# Altium PCB PCB1.PcbDoc (part 2 of 2)
Units mm, origin at the board's own origin, x right, y up, seen from the top; angles counter-clockwise.
Board outline 135 x 78 mm, 2 copper layers (Top Layer, Bottom Layer); 157 components, 80 nets, 337 pads, 19 vias.
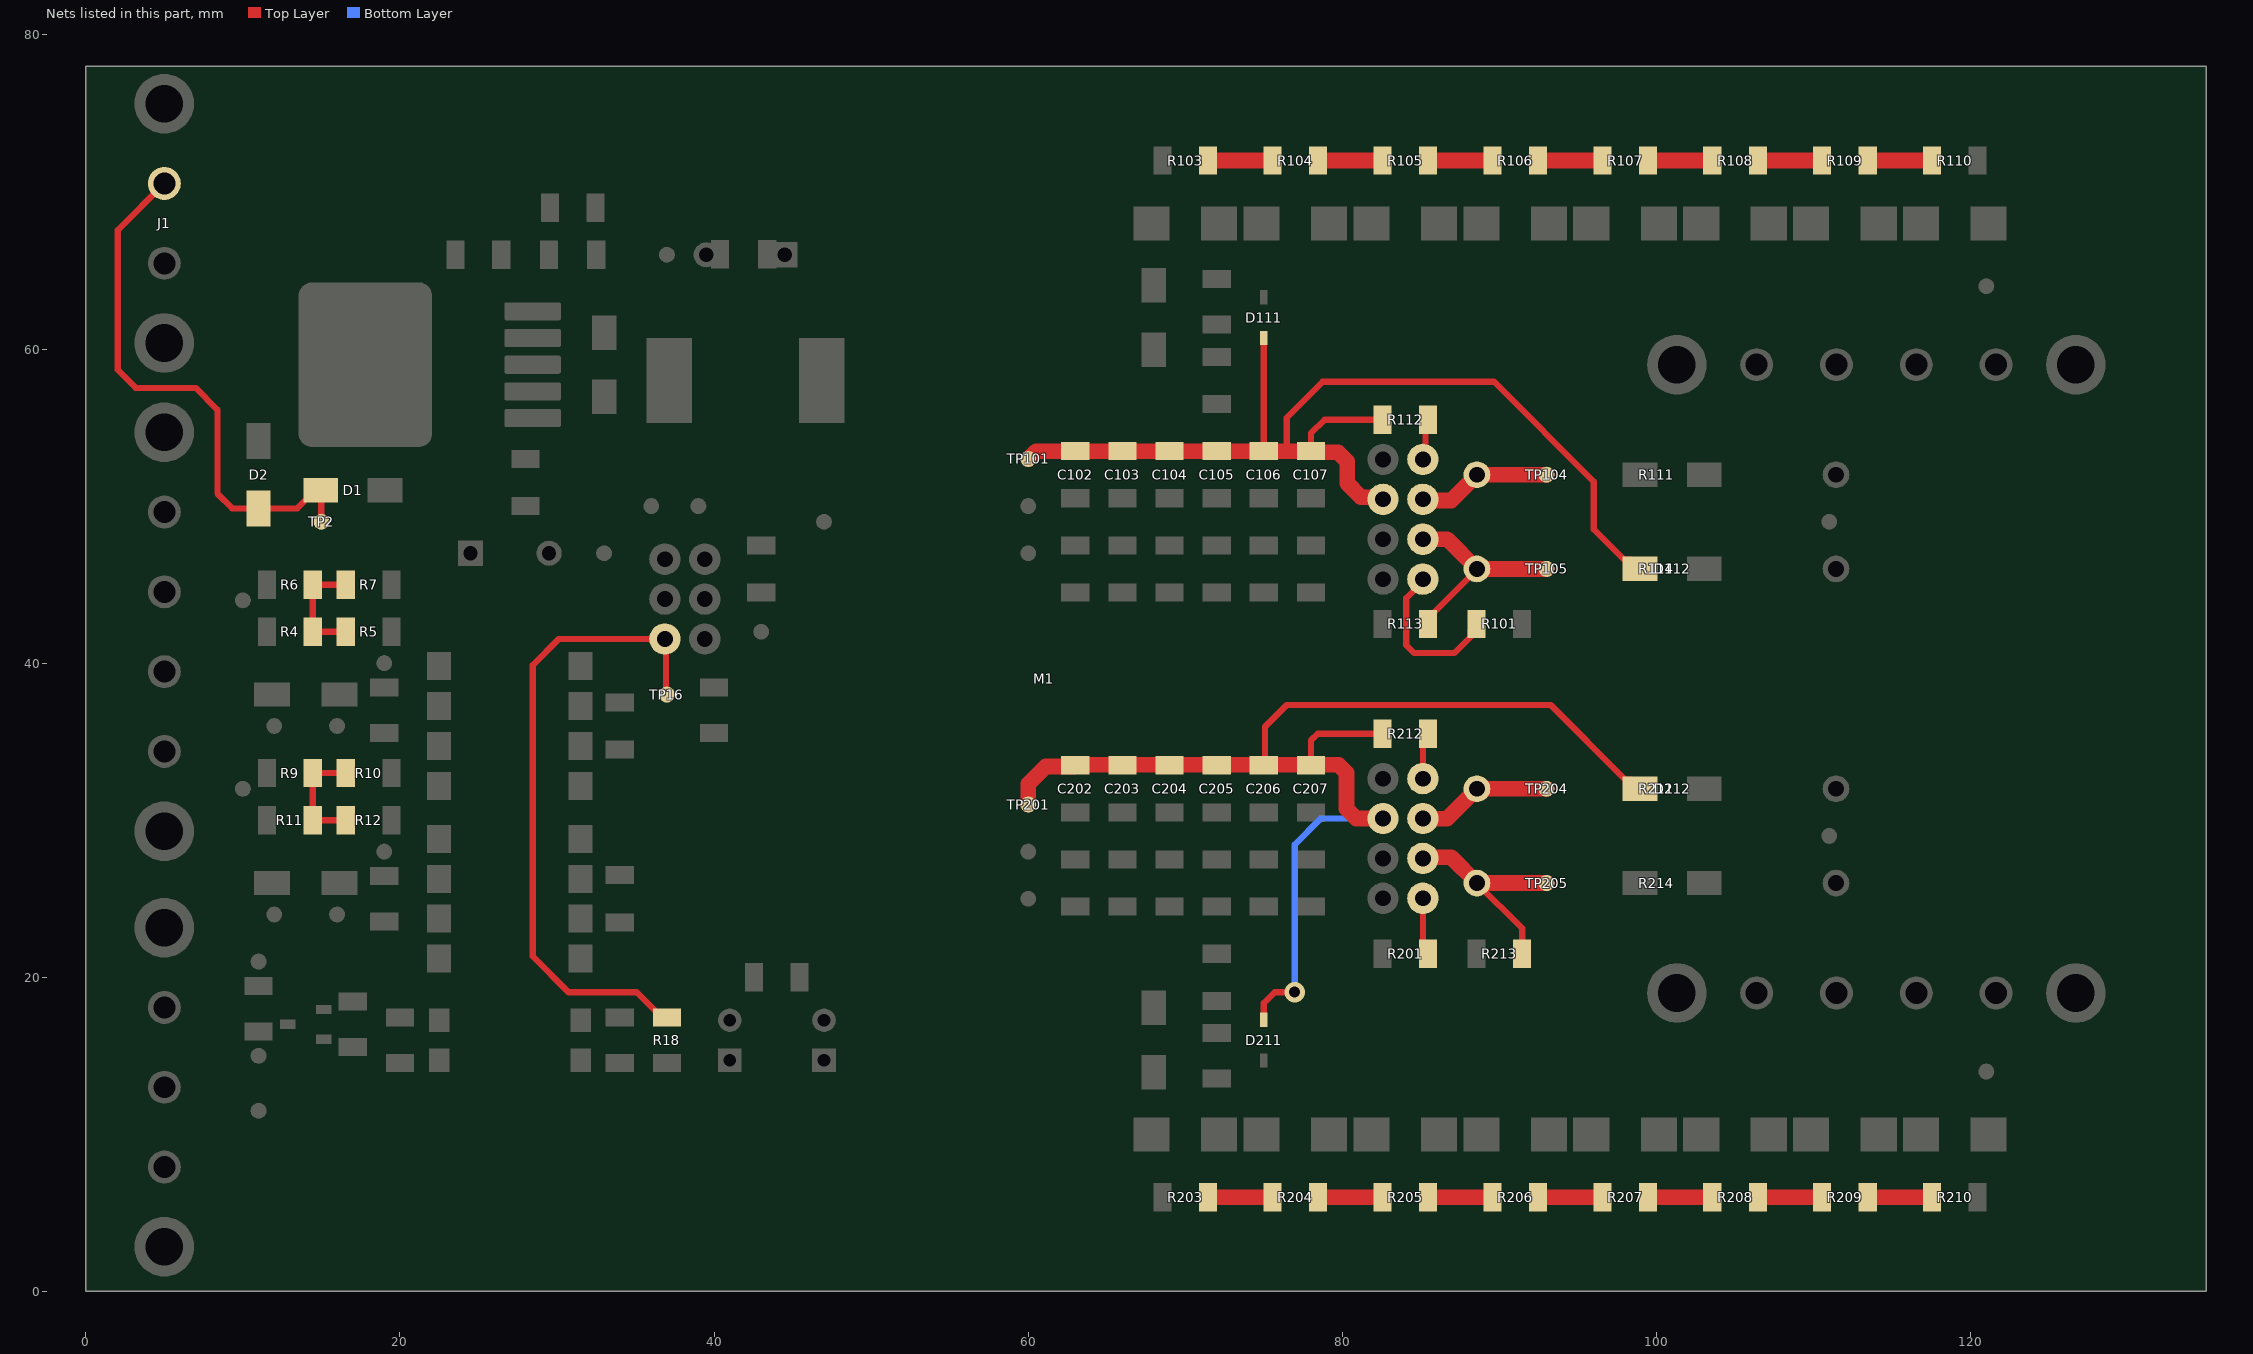
[diagram p2: the nets of this part, all layers, seen from the top]

## Via types
v1: diameter 1.3, hole 0.7, Top Layer to Bottom Layer, 19 vias

## Nets (pads, with @x,y where several pads share a name; then routed paths per layer and width w, separated by ;. In a path a pad name is that pad's centre, name@x,y a point inside that pad or via, vN(x,y) a via of type N, cw(c..) or ccw(c..) an arc to the next point about the centre after c; other vN are vias at no path point) (continued)
NetM1_2: M1.2 R18.1 TP16.1 | length 41.4
  Top Layer w0.4: R18.1@37,17.45 36.675,17.45 35.075,19.05 30.734,19.05 28.448,21.336 28.448,39.878 30.11,41.54 M1.2@36.87,41.54 36.935,41.475 36.935,38.065 TP16.1@37,38
NetM1_8: M1.8 R112.1 | length 2.7
  Top Layer w0.4: M1.8@85.13,52.97 85.29,53.13 85.29,55.34 R112.1@85.45,55.5
NetM1_10: M1.10 R111.1 TP104.1 | length 8.8
  Top Layer w1: M1.10@85.13,50.43 85.203,50.357 86.927,50.357 R111.1@88.57,52 ; R111.1@88.381,52 TP104.1@93,52
NetM1_12: M1.12 R113.1 R114.1 TP105.1 | length 13.5
  Top Layer w0.4: R113.1@85.45,42.5 85.45,42.825 88.57,45.945 R114.1@88.57,46
  Top Layer w1: M1.12@85.13,47.89 85.137,47.897 86.673,47.897 R114.1@88.57,46 TP105.1@93,46
NetM1_14: M1.14 R101.1 | length 10.3
  Top Layer w0.4: M1.14@85.13,45.35 85.13,45.199 84.074,44.143 84.074,41.148 84.582,40.64 87.122,40.64 88.175,41.693 88.175,42.125 R101.1@88.55,42.5
NetM1_16: M1.16 R212.1 | length 3
  Top Layer w0.4: M1.16@85.13,32.65 85.13,35.18 R212.1@85.45,35.5
NetM1_18: M1.18 R211.1 TP204.1 | length 8.7
  Top Layer w1: M1.18@85.13,30.11 85.137,30.103 86.673,30.103 R211.1@88.57,32 TP204.1@93,32
NetM1_20: M1.20 R213.1 R214.1 TP205.1 | length 14.8
  Top Layer w0.4: R214.1@88.57,26 91.45,23.12 R213.1@91.45,21
  Top Layer w1: M1.20@85.13,27.57 85.203,27.643 86.927,27.643 R214.1@88.57,26 TP205.1@93,26
NetM1_22: M1.22 R201.1 | length 3.7
  Top Layer w0.4: M1.22@85.13,25.03 85.13,21.82 R201.1@85.45,21.5
NetR4_2: R4.2 R5.1 R6.2 R7.1 | length 7.2
  Top Layer w0.4: R5.1@16.55,42 R4.2@14.45,42 R6.2@14.45,45 R7.1@16.55,45
NetR9_2: R9.2 R10.1 R11.2 R12.1 | length 7.2
  Top Layer w0.4: R12.1@16.55,30 R11.2@14.45,30 R9.2@14.45,33 R10.1@16.55,33
NetR103_2: R103.2 R104.1 | length 4.1
  Top Layer w1: R103.2@71.45,72 R104.1@75.55,72
NetR104_2: R104.2 R105.1 | length 4.1
  Top Layer w1: R104.2@78.45,72 R105.1@82.55,72
NetR105_2: R105.2 R106.1 | length 4.1
  Top Layer w1: R105.2@85.45,72 R106.1@89.55,72
NetR106_2: R106.2 R107.1 | length 4.1
  Top Layer w1: R106.2@92.45,72 R107.1@96.55,72
NetR107_2: R107.2 R108.1 | length 4.1
  Top Layer w1: R107.2@99.45,72 R108.1@103.55,72
NetR108_2: R108.2 R109.1 | length 4.1
  Top Layer w1: R108.2@106.45,72 R109.1@110.55,72
NetR109_2: R109.2 R110.1 | length 4.1
  Top Layer w1: R109.2@113.45,72 R110.1@117.55,72
NetR203_2: R203.2 R204.1 | length 4.1
  Top Layer w1: R203.2@71.45,6 R204.1@75.55,6
NetR204_2: R204.2 R205.1 | length 4.1
  Top Layer w1: R204.2@78.45,6 R205.1@82.55,6
NetR205_2: R205.2 R206.1 | length 4.1
  Top Layer w1: R205.2@85.45,6 R206.1@89.55,6
NetR206_2: R206.2 R207.1 | length 4.1
  Top Layer w1: R206.2@92.45,6 R207.1@96.55,6
NetR207_2: R207.2 R208.1 | length 4.1
  Top Layer w1: R207.2@99.45,6 R208.1@103.55,6
NetR208_2: R208.2 R209.1 | length 4.1
  Top Layer w1: R208.2@106.45,6 R209.1@110.55,6
NetR209_2: R209.2 R210.1 | length 4.1
  Top Layer w1: R209.2@113.45,6 R210.1@117.55,6
VIN: D1.2 D2.1 J1.1 TP2.1 | length 35.3
  Top Layer w0.4: J1.1@5,70.54 2.032,67.572 2.032,58.674 3.184,57.522 6.994,57.522 8.382,56.134 8.382,50.8 9.332,49.85 D2.1@11,49.85 13.475,49.85 14.625,51 D1.2@14.95,51 15,50.95 TP2.1@15,49
VISO_A: C102.2 C103.2 C104.2 C105.2 C106.2 C107.2 D111.1 D112.1 M1.9 R112.2 TP101.1 | length 70.4
  Top Layer w0.4: C105.2@72,53.5 C105.2@72.325,53.5 ; C106.2@75,53.5 75,56.712 D111.1@75,60.7 ; 76.454,53.5 76.454,55.626 78.74,57.912 89.662,57.912 96.012,51.562 96.012,48.514 97.951,46.575 98.375,46.575 D112.1@98.95,46 ; C107.2@78,53.5 78,54.632 78.868,55.5 R112.2@82.55,55.5
  Top Layer w1: TP101.1@60.003,53.003 60.007,53.003 60.504,53.5 C103.2@66,53.5 C104.2@69,53.5 C105.2@72,53.5 ; C105.2@72.325,53.5 C106.2@75,53.5 75.278,53.5 76.454,53.5 C107.2@78,53.5 78.075,53.425 79.723,53.425 80.309,52.839 80.309,51.453 81.193,50.569 82.451,50.569 M1.9@82.59,50.43
VISO_B: C202.2 C203.2 C204.2 C205.2 C206.2 C207.2 D211.1 D212.1 M1.17 R212.2 TP201.1 | length 82.1
  Top Layer w0.4: D211.1@75,17.3 75,18.358 75.692,19.05 v1(76.962,19.05) ; C206.2@75.353,33.528 75.325,33.5 C206.2@75,33.5 74.676,33.824 75.03,33.824 75.081,33.875 75.081,35.965 76.454,37.338 93.261,37.338 98.024,32.575 98.375,32.575 D212.1@98.95,32 ; C207.2@78,33.5 78,33.528 78,35.074 78.426,35.5 R212.2@82.55,35.5
  Top Layer w1: TP201.1@60,31 60,32.314 61.111,33.425 62.925,33.425 63.028,33.528 66,33.528 69,33.528 72,33.528 C206.2@75,33.528 ; C206.2@75.353,33.528 78,33.528 79.756,33.528 80.264,33.02 80.264,30.734 80.888,30.11 M1.17@82.59,30.11
  Bottom Layer w0.4: v1(76.962,19.05) 76.962,28.448 78.624,30.11 M1.17@82.59,30.11
pads on no net: IC2.1 IC2.4 IC3.1 IC3.4 J1.P1 J1.P2 J2.P1 J2.P2 J3.2 J3.P1 J3.P2 J4.P1 J4.P2 J5.3 J5.P1 J5.P2

## Polygon pours and split planes (outlines as drawn)
GND on Top Layer "GND_L01_P000" (solid, pour order 0): 4,67 11,67 13,65 20,65 23,68 40.318,68 49,59.318 49,12 48,11 31,11 30,12 30,44 25.486,48.514 10.486,48.514 9,50 9,61 6,64 4,64 3,65 3,66
GND on Bottom Layer "GND_L02_P001" (solid, pour order 1): 4,67 11,67 13,65 20,65 23,68 39.199,68 49,58.199 49,12 48,11 31,11 30,12 30,44 25.486,48.514 10.486,48.514 9,50 9,61 6,64 4,64 3,65 3,66

## Other copper
Top Layer:
  rectangle net NetR4_2: 13.907,41.121 17.131,45.901
  rectangle net NetR9_2: 13.89,29.109 17.114,33.89
  region net IN_A_P: 10.902,42.621 10.45,42.89 9.652,43.688 9.652,44.109 9.927,44.383 9.906,44.404 9.906,44.958 10.414,44.958 11.176,45.72 11.684,45.212 11.684,42.672 11.43,42.672 11.05,42.126
  region net IN_B_P: 9.948,34.793 10.808,33.896 11.45,33.896 11.45,30.5 11.176,30.226 11.176,30.734 9.906,32.004 9.906,33.528
  region net NetM1_20: 90.678,25.654 90.17,25.146 90.17,24.384 89.154,25.4 89.154,25.654
  region net COM_A: 58.094,46.959 60.997,44.233 61.271,44.507 61.411,44.507 61.411,44.761 58.928,47.244
  region net NetC2_1: 22.352,46.482 21.844,46.99 22.352,47.498 22.606,47.498
  region net +15V: 42.672,67.564 43.688,67.564 43.18,67.056
  region net +15V: 42.164,67.056 42.164,66.294 42.418,66.548 42.672,66.548
  region net +15V: 47.244,43.18 48.26,42.164 48.311,42.164 49.327,43.18
  region net +15V: 45.466,43.18 46.482,42.164 46.533,42.164 47.549,43.18
  region net +15V: 43.637,43.18 44.653,42.164 44.704,42.164 45.72,43.18
  region net +15V: 42.339,43.18 42.988,42.531 43.637,43.18
  region net EGND: 5.334,8.636 4.959,8.968 6.214,9.19 6.05,7.878
  region net +15V: 44.704,61.722 41.91,64.516 41.91,66.294 43.434,67.818 48.514,67.818 50.8,65.532 50.8,44.653 49.147,43 38.788,43 38.354,43.434 38.354,44.704 38.862,45.212 44.704,45.212 45.466,45.974 45.466,54.61 44.704,55.372
  region net NetC2_1: 25.654,56.134 30.226,56.134 30.734,55.626 30.734,52.832 30.226,52.324 27.178,52.324 25.908,51.054 25.908,46.228 25.4,45.72 23.114,45.72 22.352,46.482 22.352,52.832
  region net NetD3_1: 26.67,56.896 26.924,56.642 30.734,56.642 31.75,55.626 35.052,55.626 35.56,55.118 38.608,55.118 38.862,55.372 38.862,60.706 38.608,60.96 35.814,60.96 35.56,60.706 35.56,59.182 35.052,58.674 31.75,58.674 30.988,57.912 26.924,57.912 26.67,57.658
  region net EMITTER_A: 59.182,50.546 59.69,51.054 78.994,51.054 79.248,50.8 79.248,46.99 78.994,46.736 62.23,46.736 59.182,49.784
  region net EMITTER_B: 59.182,28.702 59.436,28.956 61.214,28.956 61.722,29.464 61.722,30.988 61.976,31.242 78.74,31.242 78.994,30.988 78.994,26.924 78.74,26.67 62.23,26.67 61.468,27.432 59.436,27.432 59.182,27.686
  region net GATE_A: 110,60 110.706,60.706 112.294,60.706 113,60 113,45 112,44 103,44 102,45 102,53 103,54 109,54 110,55
  region net GATE_B: 110,18 110.728,17.272 112.272,17.272 113,18 113,33 112,34 103,34 102,33 102,25 103,24 109,24 110,23
  text "3" at 32.249,72.489 h5
  text "Top Layer" at 0.3,-7.034 h2
Bottom Layer:
  region net EMITTER_A: 69.85,48.514 71.628,46.736 78.232,46.736 80.01,48.514 80.01,51.054 81.026,52.07 83.058,52.07 83.566,52.578 83.566,53.848 84.328,54.61 89.916,54.61 94.488,50.038 106.426,50.038 107.95,51.562 107.95,59.436 107.188,60.198 105.664,60.198 104.902,59.436 104.902,56.642 103.124,54.864 95.504,54.864 91.948,58.42 79.756,58.42 73.66,52.324 71.12,52.324 69.85,51.054 69.85,50.8
  region net EMITTER_B: 73.66,26.67 78.74,31.75 83.058,31.75 83.566,32.258 83.566,33.782 84.328,34.544 91.948,34.544 104.648,21.844 104.648,18.542 105.664,17.526 107.188,17.526 108.204,18.542 108.204,26.796 97.408,37.592 64.008,37.592 61.722,35.306 61.722,28.956 64.008,26.67 64.516,26.67
  text "4" at 38.466,72.462 h5
  text "10/06/2022" at 46.447,3.9 h2.2
  text "Bottom Layer" at 23.626,-7.034 h2

## Silkscreen, mask and mechanical layers (free items; w line width, h text height)
Top Overlay:
  circle w0.3: c17,73 r4.5
  circle w0.3: c54,73 r4.5
  circle w0.3: c130,73 r4.5
  circle w0.3: c130,5 r4.5
  circle w0.3: c54,5 r4.5
  circle w0.3: c17,5 r4.5
  region: 124.571,28.103 123.321,28.603 124.071,29.353
  lines w0.254: 9.7,49.4 12.3,49.4 ; 9.7,49.572 12.178,49.572 ; 9.7,49.744 12.178,49.744 ; 9.7,49.998 12.178,49.998 ; 16.002,36.7 16.002,39.178 ; 16.256,36.7 16.256,39.178 ; 16.428,27.178 16.428,24.7 16.002,24.7 16.002,27.178 16.256,27.178 16.256,24.7 16.6,24.7 16.6,27.3 ; 16.428,36.7 16.428,39.178 ; 16.6,36.7 16.6,39.3 ; 19.052,49.713 19.052,52.191 ; 19.306,49.713 19.306,52.191 ; 19.478,49.713 19.478,52.191 ; 19.65,49.713 19.65,52.313 ; 31.688,61.65 34.288,61.65 ; 31.81,61.052 34.288,61.052 ; 31.81,61.306 34.288,61.306 ; 31.81,61.478 34.288,61.478 ; 66.688,64.65 69.288,64.65 ; 66.713,13.35 69.313,13.35 ; 66.713,13.522 69.191,13.522 ; 66.713,13.694 69.191,13.694 ; 66.713,13.948 69.191,13.948 ; 66.81,64.052 69.288,64.052 ; 66.81,64.306 69.288,64.306 ; 66.81,64.478 69.288,64.478 ; 72.136,11.684 72.136,8.375 72.39,8.375 72.39,11.625 72.65,11.625 72.65,8.55 ; 72.136,66.375 72.136,69.684 ; 72.39,66.375 72.39,69.625 ; 72.65,66.55 72.65,69.625 ; 79.136,8.375 79.136,11.684 ; 79.136,66.375 79.136,69.684 ; 79.39,8.375 79.39,11.625 ; 79.39,66.375 79.39,69.625 ; 79.65,8.55 79.65,11.625 ; 79.65,66.55 79.65,69.625 ; 86.136,8.375 86.136,11.684 ; 86.136,66.375 86.136,69.684 ; 86.39,8.375 86.39,11.625 ; 86.39,66.375 86.39,69.625 ; 86.65,8.55 86.65,11.625 ; 86.65,66.55 86.65,69.625 ; 93.136,8.375 93.136,11.684 ; 93.136,66.375 93.136,69.684 ; 93.39,8.375 93.39,11.625 ; 93.39,66.375 93.39,69.625 ; 93.65,8.55 93.65,11.625 ; 93.65,66.55 93.65,69.625 ; 98.35,30.688 98.35,33.288 ; 98.35,44.688 98.35,47.288 ; 98.522,30.81 98.522,33.288 ; 98.522,44.81 98.522,47.288 ; 98.694,30.81 98.694,33.288 ; 98.694,44.81 98.694,47.288 ; 98.948,30.81 98.948,33.288 ; 98.948,44.81 98.948,47.288 ; 100.136,8.375 100.136,11.684 ; 100.136,66.375 100.136,69.684 ; 100.39,8.375 100.39,11.625 ; 100.39,66.375 100.39,69.625 ; 100.65,8.55 100.65,11.625 ; 100.65,66.55 100.65,69.625 ; 103.052,24.713 103.052,27.19 ; 103.052,50.713 103.052,53.191 ; 103.306,24.713 103.306,27.19 ; 103.306,50.713 103.306,53.191 ; 103.478,24.713 103.478,27.19 ; 103.478,50.713 103.478,53.191 ; 103.65,24.713 103.65,27.313 ; 103.65,50.713 103.65,53.313 ; 107.136,8.375 107.136,11.684 ; 107.136,66.375 107.136,69.684 ; 107.39,8.375 107.39,11.625 ; 107.39,66.375 107.39,69.625 ; 107.65,8.55 107.65,11.625 ; 107.65,66.55 107.65,69.625 ; 114.136,8.375 114.136,11.684 ; 114.136,66.375 114.136,69.684 ; 114.39,8.375 114.39,11.625 ; 114.39,66.375 114.39,69.625 ; 114.65,8.55 114.65,11.625 ; 114.65,66.55 114.65,69.625 ; 121.136,8.375 121.136,11.684 ; 121.136,66.375 121.136,69.684 ; 121.39,8.375 121.39,11.625 ; 121.39,66.375 121.39,69.625 ; 121.65,8.55 121.65,11.625 ; 121.65,66.55 121.65,69.625
  lines w0.35: 120.321,29.853 122.071,28.103 122.071,30.603 124.071,28.603 ; 117.321,29.353 125.321,33.353 125.321,25.353 117.321,29.353 ; 117.821,48.353 125.821,44.353 125.821,52.353 117.821,48.353
  text "1" at 24.61,72.459 h5
  text "TP1 = +15V" at 53.2,66.7 h0.8
  text "TP2 = +24V" at 53.2,64.7 h0.8
  text "TP18 = 0V" at 53.2,62.7 h0.8
  text "!" at 124.921,47.853 h7.5 r90
  text "DANGER" at 128.571,44.603 h2 r90
  text "! HV !" at 128.571,26.103 h3 r90
  text "TPx01 = +15V" at 53.2,14.7 h0.8
  text "TPx02 = 0V" at 53.2,12.7 h0.8
  text "TPx03 = -9V" at 53.2,10.7 h0.8
  text "Top Overlay" at 0.3,-7.034 h2
Bottom Overlay:
  circle w0.3: c17,73 r4.5
  circle w0.3: c54,73 r4.5
  circle w0.3: c130,73 r4.5
  circle w0.3: c130,5 r4.5
  circle w0.3: c54,5 r4.5
  circle w0.3: c17,5 r4.5
  region: 124.75,30.5 123.5,30 124.25,29.25
  lines w0.254: 16.51,8.89 16.51,21.59 ; 16.51,33.02 16.51,40.64 ; 16.51,43.18 16.51,50.8 ; 16.51,62.23 16.51,69.85 ; 30.734,43.434 30.734,50.546 ; 31.242,43.942 31.242,50.038 ; 37.338,63.754 37.338,68.326 ; 37.846,62.992 37.846,69.088 ; 38.354,62.484 38.354,69.596 ; 21,17 ccw(c25,17) 29,17 29,36 ccw(c25,36) 21,36 21,17 ; 61,3 61,20 88,20 88,3 61,3
  lines w0.35: 120.5,28.75 122.25,30.5 122.25,28 124.25,30 ; 117.321,29.353 125.321,25.353 125.321,33.353 117.321,29.353 ; 117.821,48.353 125.821,52.353 125.821,44.353 117.821,48.353
  text "O`zbekistonda" at 88.7,73.25 h1.5
  text "6" at 46.385,72.489 h5
  text "VCC" at 13.126,70.62 h1
  text "ishlab" at 88.7,70.25 h1.5
  text "chiqarilgan" at 88.7,67.5 h1.5
  text "A" at 91.002,66.668 h10 r270
  text "EMITTER" at 103.64,66.34 h1 r270
  text "GATE" at 108.72,66.34 h1 r270
  text "NC" at 113.8,66.34 h1 r270
  text "COLLECTOR" at 118.88,66.34 h1 r270
  text "GND" at 13.126,65.54 h1
  text "24V" at 17.28,64.707 h1 r270
  text "OOO\"MIKROELEKTRONIKA PLYUS\"" at 88.7,64.125 h1.5
  text "IGBT Gate Driver 15A" at 88.7,61.25 h1.5
  text "DANGER" at 128.596,52 h2 r90
  text "IN_P" at 13.959,49.113 h1
  text "!" at 124.921,47.853 h7.5 r90
  text "B" at 17.28,46.657 h1 r270
  text "IN_N" at 13.959,44.033 h1
  text "IN_P" at 13.959,38.953 h1
  text "A" at 17.28,36.497 h1 r270
  text "IN_N" at 13.959,33.873 h1
  text "! HV !" at 128.553,32.443 h3 r90
  text "EVCC" at 14.125,19.82 h1
  text "Serial number" at 24.3,17.3 h1.5 r270
  text "ERROR" at 15.125,14.74 h1
  text "A & B" at 17.28,12.907 h1 r270
  text "NC" at 113.8,10.734 h1 r270
  text "Module number" at 83.7,10.3 h1.5
  text "EGND" at 14.125,9.66 h1
  text "GATE" at 108.72,8.735 h1 r270
  text "EMITTER" at 103.64,5.902 h1 r270
  text "B" at 91.002,5.668 h10 r270
  text "COLLECTOR" at 118.88,3.736 h1 r270
  text "Bottom Overlay" at 26.625,-6.034 h2
Top Paste:
  text "Top Paste" at 0.3,-7.034 h2
Bottom Paste:
  text "Bottom Paste" at 22.626,-6.7 h2
Top Solder:
  rectangle: 23.314,72.07 24.314,76.07
  rectangle: 31.314,72.07 35.314,76.07
  lines w0.254: 23.314,72.07 23.314,76.07 35.314,76.07 35.314,72.07 23.314,72.07
  text "2" at 26.314,72.07 h5
  text "Top Solder" at 0.3,-7.034 h2
Bottom Solder:
  rectangle: 42.175,72.134 43.98,76.134
  rectangle: 46.615,72.07 47.746,76.07
  rectangle: 35.314,72.06 39.639,76.07
  lines w0.254: 35.314,72.06 47.616,72.069 47.616,76.07 35.314,76.07 35.314,72.06
  text "5" at 42.579,72.06 h5
  text "Bottom Solder" at 24.292,-6.7 h2
Top SMD Glue:
  lines w0.254: 168,9 169,9 170,11 172,12 ; 178,9 179,10 ; 180.555,10.019 179.823,9.448 ; 180.782,9.212 179.823,9.448 ; 183,12 185,11 186,9 187,9 ; 192.995,12.214 179.823,9.448 ; 156.536,6.757 156.841,7.061 ; 156.536,6.757 156.841,7.061 ; 156.536,6.757 156.841,7.061 ; 156.536,6.757 156.841,7.061 ; 156.536,6.757 157.146,6.299 ; 156.536,6.757 157.146,6.299 ; 156.536,6.757 157.146,6.299 ; 156.536,6.757 157.146,6.299 ; 156.536,7.519 157.011,7.714 ; 156.536,7.519 157.011,7.714 ; 156.536,7.519 157.011,7.714 ; 156.536,7.519 156.841,7.061 ; 156.536,7.519 156.841,7.061 ; 156.536,7.519 156.841,7.061 ; 156.536,7.519 156.841,7.061 ; 156.536,7.519 157.011,7.714 ; 156.587,8.331 157.011,7.714 ; 156.587,8.331 157.011,7.714 ; 156.587,8.331 157.011,7.714 ; 156.587,8.331 157.011,7.714 ; 156.587,8.331 198.141,8.331 ; 156.587,8.331 198.141,8.331 ; 156.689,5.537 157.011,5.809 ; 156.689,5.537 157.011,5.809 ; 156.689,5.537 198.599,5.537 ; 156.689,5.537 198.599,5.537 ; 156.689,5.537 157.011,5.809 ; 156.689,5.537 157.011,5.809 ; 156.689,6.299 157.011,5.809 ; 156.689,6.299 157.011,5.809 ; 156.689,6.299 157.146,6.299 ; 156.689,6.299 157.146,6.299 ; 156.689,6.299 157.011,5.809 ; 156.689,6.299 157.011,5.809 ; 156.689,6.299 157.146,6.299 ; 156.689,6.299 157.146,6.299 ; 177,9 177,10 179,10 ; 177,9 178,10 179,10 ; 177,9 179,9 179,10 ; 197.837,5.842 198.599,5.537 ; 197.837,5.842 198.599,5.537 ; 197.837,5.842 198.599,5.537 ; 197.837,5.842 198.294,5.995 ; 197.837,5.842 198.294,5.995 ; 197.837,5.842 198.599,5.537 ; 197.837,6.147 198.141,6.604 ; 197.837,6.147 198.294,5.995 ; 197.837,6.147 198.294,5.995 ; 197.837,6.147 198.141,6.604 ; 197.837,6.909 198.141,6.604 ; 197.837,6.909 198.141,6.604 ; 197.837,6.909 198.446,7.366 ; 197.837,6.909 198.446,7.366 ; 197.989,7.823 198.141,8.331 ; 197.989,7.823 198.446,7.366 ; 197.989,7.823 198.446,7.366 ; 197.989,7.823 198.141,8.331 ; 172,11 183,11 183,15 172,15 172,13 172,11
  lines w0.5: 10.456,51.991 11.456,51.991 ; 13.973,37.45 13.973,38.45 ; 13.992,25.529 13.992,26.529 ; 17,50.454 17,51.454 ; 26.936,24.562 26.936,25.562 ; 26.936,35.562 26.936,36.562 ; 26.987,15.462 26.987,16.462 ; 42.098,57.386 42.098,58.386 ; 67.451,61.99 68.451,61.99 ; 67.463,16.013 68.463,16.013 ; 70.033,9.546 70.033,10.546 ; 70.036,67.42 70.036,68.42 ; 77.033,9.546 77.033,10.546 ; 77.036,67.42 77.036,68.42 ; 84.033,9.546 84.033,10.546 ; 84.036,67.42 84.036,68.42 ; 91.033,9.546 91.033,10.546 ; 91.036,67.42 91.036,68.42 ; 98.033,9.546 98.033,10.546 ; 98.036,67.42 98.036,68.42 ; 101.03,25.41 101.03,26.41 ; 101.03,31.41 101.03,32.41 ; 101.124,45.556 101.124,46.556 ; 101.124,51.556 101.124,52.556 ; 105.033,9.546 105.033,10.546 ; 105.036,67.42 105.036,68.42 ; 112.033,9.546 112.033,10.546 ; 112.036,67.42 112.036,68.42 ; 119.033,9.546 119.033,10.546 ; 119.036,67.42 119.036,68.42
  text "SMD" at 176,12 h1.52
  text "SMD Glue" at 194.3,11.3 h2
  text "PCB" at 176,6 h1.52
  text "Additional glue to increase the strength of SMD" at 201.3,5.966 h2
  text "Top SMD Glue" at 0.3,-7.034 h2
Additional information:
  drawing of 875 lines, arcs and shapes, not listed
  text "2" at 6.026,168.971 h1.91
  text "LAYER STUCK-UP" at 11.106,168.971 h1.91
  text "LAYER STUCK-UP" at 11.106,168.971 h1.91
  text "SOLDERMASK & SILKSCREEN" at 55.81,162.875 h1.52
  text "SOLDERMASK & SILKSCREEN" at 55.81,162.875 h1.52
  text "," at 192.254,158.262 h1.52
  text "," at 222.254,158.262 h1.52
  text "Board type:" at 152.254,158.254 h1.5
  text "Single pieces" at 171.002,158.254 h1.5
  text "Panel by Customer" at 195.004,158.254 h1.5
  text "Panel by Manufacturer" at 226.756,158.254 h1.5
  text "." at 259.754,157.754 h1.52
  text "TOP     (1 oz cu+planted)" at 55.81,154.827 h1.52
  text "135mm" at 185.3,153.3 h2
  text "78mm" at 213.335,153.3 h2
  text "Size (single):" at 152.254,153.254 h1.5
  text "Length" at 173.499,153.254 h1.5
  text "," at 197.254,153.262 h1.52
  text "Width" at 202.748,152.754 h1.5
  text "." at 224.754,152.754 h1.52
  text "20" at 189.3,148.3 h2
  text "Quantity (single):" at 152.254,148.254 h1.5
  text "Pcs" at 180.247,147.754 h1.5
  text "." at 199.754,147.754 h1.52
  text "1.6 mm" at 0,145 h1.91
  text "Layers:" at 152.254,143.254 h1.5
  text "1 Layer" at 164.749,143.254 h1.5
  text "," at 177.254,143.262 h1.52
  text "2 Layer" at 179.499,143.254 h1.5
  text "," at 192.254,143.262 h1.52
  text "4 Layer" at 194.499,143.254 h1.5
  text "," at 207.254,143.262 h1.52
  text "6 Layer" at 209.499,143.254 h1.5
  text "," at 222.254,143.262 h1.52
  text "8 Layer" at 224.499,143.254 h1.5
  text "," at 237.254,143.262 h1.52
  text "10 Layer" at 240.75,143.254 h1.5
  text "," at 254.754,143.262 h1.52
  text "12 Layer" at 258.25,143.254 h1.5
  text "," at 272.254,143.262 h1.52
  text "14 Layer" at 275.75,143.254 h1.5
  text "PREPREG  ** mil" at 22.282,142.936 h1.52
  text "PREPREG  ** mil" at 22.282,142.936 h1.52
  text "." at 289.754,142.754 h1.52
  text "+/-10%" at 1.2,142.555 h1.27
  text "+/-10%" at 1.2,142.555 h1.27
  text "," at 177.254,138.262 h1.52
  text "," at 194.754,138.262 h1.52
  text "Rogers" at 198.249,138.254 h1.5
  text "," at 209.754,138.262 h1.52
  text "," at 247.254,138.262 h1.52
  text "Copper Base" at 250.751,138.254 h1.5
  text "," at 329.754,138.262 h1.52
  text "," at 349.754,138.262 h1.52
  text "," at 369.754,138.262 h1.52
  text "Material:" at 152.254,137.754 h1.5
  text "FR-4" at 168.748,137.754 h1.5
  text "Aluminum" at 180.75,137.754 h1.5
  text "HDI(Buried/blind vias)" at 213.756,137.754 h1.5
  text "." at 269.754,137.754 h1.52
  text "FR4-TG:" at 299.754,137.754 h1.5
  text "TG 130-140" at 312.751,137.754 h1.5
  text "TG 150-160" at 332.751,137.754 h1.5
  text "TG 170-180" at 352.751,137.754 h1.5
  text "S1000H TG150" at 374.752,137.754 h1.5
  text "." at 394.754,137.754 h1.52
  text "," at 177.254,133.262 h1.52
  text "," at 187.254,133.262 h1.52
  text "," at 197.254,133.262 h1.52
  text "," at 207.254,133.262 h1.52
  text "," at 217.254,133.262 h1.52
  text "," at 227.254,133.262 h1.52
  text "," at 237.254,133.262 h1.52
  text "," at 247.254,133.262 h1.52
  text "," at 257.254,133.262 h1.52
  text "," at 267.254,133.262 h1.52
  text "," at 277.254,133.262 h1.52
  text "," at 332.254,133.262 h1.52
  text "Rogers:" at 299.754,133.254 h1.5
  text "Rogers 4003C" at 311.752,133.254 h1.5
  text "Rogers 4350B" at 334.252,133.254 h1.5
  text "Thickness:" at 152.254,132.754 h1.5
  text "0.2" at 170.497,132.754 h1.5
  text "0.4" at 180.497,132.754 h1.5
  text "0.8" at 190.497,132.754 h1.5
  text "1.0" at 200.747,132.754 h1.5
  text "1.2" at 210.747,132.754 h1.5
  text "1.6" at 220.747,132.754 h1.5
  text "2.0" at 230.497,132.754 h1.5
  text "2.4" at 240.497,132.754 h1.5
  text "2.6" at 250.497,132.754 h1.5
  text "2.8" at 260.497,132.754 h1.5
  text "3.0" at 270.497,132.754 h1.5
  text "3.2" at 280.497,132.754 h1.5
  text "." at 287.254,132.754 h1.52
  text "." at 354.754,132.754 h1.52
  text "BOTTOM  (1 oz cu+planted)" at 55.81,131.807 h1.52
  text "," at 192.254,128.262 h1.52
  text "," at 207.254,128.262 h1.52
  text "," at 222.254,128.262 h1.52
  text "," at 237.254,128.262 h1.52
  text "," at 349.754,128.262 h1.52
  text "," at 369.754,128.262 h1.52
  text "Min Track/Spacing:" at 152.254,128.254 h1.5
  text "Thermal conductivity:" at 299.754,128.254 h1.5
  text "3/3mil" at 181.499,127.754 h1.5
  text "4/4mil" at 196.499,127.754 h1.5
  text "5/5mil" at 211.499,127.754 h1.5
  text "6/6mil" at 226.499,127.754 h1.5
  text "8/8mil" at 241.499,127.754 h1.5
  text "." at 252.254,127.754 h1.52
  text "1.0W/(m*K)" at 333.5,127.754 h1.5
  text "2.0W/(m*K)" at 353.25,127.754 h1.5
  text "3.0W/(m*K)" at 373.25,127.754 h1.5
  text "." at 389.754,127.754 h1.52
  text "SOLDERMASK & SILKSCREEN" at 55.81,123.759 h1.52
  text "SOLDERMASK & SILKSCREEN" at 55.81,123.759 h1.52
  text "," at 187.254,123.262 h1.52
  text "," at 202.254,123.262 h1.52
  text "," at 217.254,123.262 h1.52
  text "," at 229.754,123.262 h1.52
  text "," at 244.754,123.262 h1.52
  text "," at 254.754,123.262 h1.52
  text "Min Hole Size:" at 152.254,122.754 h1.5
  text "0.15mm" at 176.249,122.754 h1.5
  text "0.2mm" at 192.498,122.754 h1.5
  text "0.25mm" at 205.999,122.754 h1.5
  text "0.3mm" at 219.998,122.754 h1.5
  text "0.8mm" at 234.998,122.754 h1.5
  text "1mm" at 247.997,122.754 h1.5
  text "No Drill" at 258.749,122.754 h1.5
  text "." at 272.254,122.754 h1.52
  text "," at 184.754,118.262 h1.52
  text "," at 194.754,118.262 h1.52
  text "," at 209.754,118.262 h1.52
  text "," at 222.254,118.262 h1.52
  text "," at 237.254,118.262 h1.52
  text "," at 249.754,118.262 h1.52
  text "Purple" at 253.499,118.254 h1.5
  text "," at 264.754,118.262 h1.52
  text "," at 287.254,118.262 h1.52
  text "Matte green" at 291.251,118.254 h1.5
  text "," at 309.754,118.262 h1.52
  text "Solder Mask:" at 152.254,117.754 h1.5
  text "Green" at 174.748,117.754 h1.5
  text "Red" at 187.747,117.754 h1.5
  text "Yellow" at 198.749,117.754 h1.5
  text "Blue" at 213.998,117.754 h1.5
  text "White" at 227.748,117.754 h1.5
  text "Black" at 240.248,117.754 h1.5
  text "Matte black" at 269.251,117.754 h1.5
  text "None" at 313.748,117.754 h1.5
  text "." at 322.254,117.754 h1.52
  text "," at 182.254,113.262 h1.52
  text "," at 194.754,113.262 h1.52
  text "Silkscreen:" at 152.254,112.754 h1.5
  text "White" at 172.748,112.754 h1.5
  text "Black" at 185.248,112.754 h1.5
  text "None" at 198.748,112.754 h1.5
  text "." at 207.254,112.754 h1.52
  text "COMPANY NAME:" at 81.28,110.32 h1.52
  text "Edge connector:" at 152.254,108.254 h1.5
  text "," at 187.254,108.262 h1.52
  text "LAYER:" at 41,108 h1.91
  text "Yes" at 180.247,107.754 h1.5
  text "No" at 194.247,107.754 h1.5
  text "." at 199.754,107.754 h1.52
  text "MIKROELEKTRONIKA PLYUS" at 83,107 h1.91
  text "www.mikroelektronika.plyus" at 7,104 h1.52
  text "," at 199.754,103.262 h1.52
  text "," at 227.254,103.262 h1.52
  text "Immersion gold(ENIG)" at 231.505,103.254 h1.5
  text "," at 262.254,103.262 h1.52
  text "," at 274.754,103.262 h1.52
  text "Hard gold" at 279,103.254 h1.5
  text "," at 294.754,103.262 h1.52
  text "Immersion silver(Ag)" at 299.005,103.254 h1.5
  text "," at 329.754,103.262 h1.52
  text "," at 347.254,103.262 h1.52
  text "None(Plain copper)" at 351.504,103.254 h1.5
  text "Surface Finish:" at 152.254,102.754 h1.5
  text "HASL with lead" at 177.002,102.754 h1.5
  text "HASL with free" at 204.502,102.754 h1.5
  text "OSP" at 267.747,102.754 h1.5
  text "ENEPIG" at 335.999,102.754 h1.5
  text "." at 379.754,102.754 h1.52
  text "PROJECT NAME:" at 81.28,102.7 h1.52
  text "Tel : +998(99)-237-27-27" at 4,100 h1.52
  text "Xusniyor" at 55,99 h1.52
  text "IGBT Gate Driver 15A" at 83,99 h1.91
  text "DESIGNER:" at 41.91,98.89 h1.52
  text "," at 197.254,98.262 h1.52
  text "," at 222.254,98.262 h1.52
  text "Tenting vias" at 177.501,98.254 h1.5
  text "Plugged vias" at 202.252,98.254 h1.5
  text "Via Process :" at 152.254,97.754 h1.5
  text "Vias not covered" at 226.253,97.754 h1.5
  text "." at 252.254,97.754 h1.52
  text "Mail: avxusi@gmail.com" at 7,96 h1.52
  text "," at 335.754,95.262 h1.52
  text "," at 348.254,95.262 h1.52
  text "REV" at 111.76,95.08 h1.52
  text "PROJECT NUMBER:" at 81,95 h1.52
  text "1U\"" at 328.747,94.754 h1.5
  text "2U\"" at 340.997,94.754 h1.5
  text "3U\"" at 353.497,94.754 h1.5
  text "." at 360.754,94.754 h1.52
  text "Thickness of / Immersion Gold:" at 300.5,94.5 h1.5
  text "Finished Copper:" at 152.254,93.254 h1.5
  text "1" at 183.2,92.9 h2
  text "oz Cu." at 187.254,92.754 h1.5
  text "DATE:" at 42,92 h1.52
  text "10.06.2022" at 51,92 h1.52
  text "Au/Ni thickness:" at 300.754,89.754 h1.5
  text "Au:" at 326.997,89.754 h1.5
  text "U\"/Ni:" at 339.001,89.754 h1.5
  text "U\"" at 355.754,89.754 h1.5
  text "." at 360.754,89.754 h1.52
  text "Inner Copper:" at 152.254,88.254 h1.5
  text "oz." at 187.254,87.754 h1.5
  text "Ni:" at 327.247,84.754 h1.5
  text "U\"/Pd:" at 338.876,84.754 h1.5
  text "U\"/Au:" at 356.376,84.754 h1.5
  text "U\"" at 373.254,84.754 h1.5
  text "." at 378.254,84.754 h1.52
  text "Thickness of / ENEPIG:" at 300.5,84.5 h1.5
  text "Gold Fingers :" at 152.254,83.254 h1.5
  text "," at 184.754,83.262 h1.52
  text "Yes" at 177.747,82.754 h1.5
  text "No" at 191.747,82.754 h1.5
  text "." at 197.254,82.754 h1.52
  text "," at 199.754,78.262 h1.52
  text "Confirm Production file :" at 152.754,77.754 h1.5
  text "Yes" at 192.747,77.754 h1.5
  text "No" at 206.747,77.754 h1.5
  text "." at 212.254,77.754 h1.52
  text "Linear Hole" at 93.254,73.254 h1.52
  text "Flying Probe Test :" at 152.254,73.254 h1.5
  text "Fully Test" at 183.25,73.254 h1.5
  text "," at 199.754,73.262 h1.52
  text "Not Test" at 203.499,72.754 h1.5
  text "." at 217.254,72.754 h1.52
  text "Hole" at 32.254,72.254 h1.52
  text "Hole" at 68.254,72.254 h1.52
  text "Gold Fingers :" at 152.254,68.254 h1.5
  text "," at 184.754,68.262 h1.52
  text "Yes" at 177.747,67.754 h1.5
  text "No" at 191.747,67.754 h1.5
  text "." at 197.254,67.754 h1.52
  text "," at 189.754,63.262 h1.52
  text "Castellated Holes :" at 152.754,62.754 h1.5
  text "Yes" at 182.747,62.754 h1.5
  text "No" at 196.747,62.754 h1.5
  text "." at 202.254,62.754 h1.52
  text "," at 194.754,58.262 h1.52
  text "Remove Order Number :" at 152.754,57.754 h1.5
  text "Yes" at 187.747,57.754 h1.5
  text "No" at 201.747,57.754 h1.5
  text "." at 207.254,57.754 h1.52
  text "Hole" at 131.254,57.746 h1.52 r270
  text "Linear Hole" at 105.746,55.254 h1.52 r90
  text "," at 194.754,53.262 h1.52
  text "4-Wire Kelvin Test :" at 152.754,52.754 h1.5
  text "Yes" at 187.747,52.754 h1.5
  text "No" at 201.747,52.754 h1.5
  text "." at 207.254,52.754 h1.52
  text "Linear Hole" at 67.254,51.254 h1.52
  text "Paper between PCBs :" at 152.754,48.254 h1.5
  text "," at 194.754,48.262 h1.52
  text "Yes" at 187.747,47.754 h1.5
  text "No" at 201.747,47.754 h1.5
  text "." at 207.254,47.754 h1.52
  text "SMD" at 176,26 h1.52
  text "SMD Glue" at 194.3,25.3 h2
  text "Linear Hole" at 68.254,25.254 h1.52
  text "PCB" at 176,20 h1.52
  text "Additional glue to increase the strength of SMD" at 201.3,19.966 h2
  text "Hole" at 132.746,19.254 h1.52 r90
  text "Linear Hole" at 95.254,7.254 h1.52
  text "Hole" at 31.254,4.254 h1.52
  text "Hole" at 68.254,4.254 h1.52
  text "Xusniyor Tuxtamuratov" at 347.3,3.966 h2
  text "Additional information" at 0.3,-6.7 h2
Board out layer:
  circle w0.5: c54,73 r3
  circle w0.5: c54,5 r3
  circle w0.5: c17,73 r3
  circle w0.5: c17,5 r3
  circle w0.5: c130,5 r3
  circle w0.5: c130,73 r3
  lines w0.5: 0,0 135,0 135,78 0,78 0,0
  lines w1.5: 54,18 54,35 ; 54,43 54,60 ; 60,39 117,39 ; 122,3 128.529,13.882 ; 122,75 128,64
  text "Board out layer" at 0.3,-7.034 h2
Component location view:
  circle w0.254: c28.473,54.305 r0.163
  lines w0.1: 13.462,60.198 13.462,63.5 cw(c14.224,63.5) 14.224,64.262 21.336,64.262 cw(c21.336,63.5) 22.098,63.5 22.098,54.61 cw(c21.082,54.61) 21.082,53.594 14.732,53.594 cw(c14.732,54.864) 13.462,54.864 13.462,60.96 ; 22.352,53.975 24.638,53.975 24.638,63.881 22.352,63.881 ; 26.416,54.864 30.226,54.864 30.226,56.134 26.416,56.134 26.416,54.864 ; 26.416,56.642 30.226,56.642 30.226,57.912 26.416,57.912 26.416,56.642 ; 26.416,58.42 30.226,58.42 30.226,59.69 26.416,59.69 26.416,58.42 ; 26.416,60.198 26.416,61.468 30.226,61.468 30.226,60.198 26.416,60.198 ; 26.416,61.976 30.226,61.976 30.226,63.246 26.416,63.246 26.416,62.992 26.416,61.976
  text "Component location view" at 0.3,-7.034 h2

## Dimensions
0,77.5 to 135,77.5 on Additional information
117.75,38.25 to 117.75,39.75 on Additional information
59.25,40 to 117.75,40.25 on Additional information
53.25,35.75 to 53.25,17.25 on Additional information
53,60.75 to 53,42.25 on Additional information
14,73 to 20,73 on Additional information
135,78 to 135,0 on Additional information

## Text inside footprints (layer, text, board x,y; h text height)
J1: Component location view "2" at 1.495,65.68 h0.75 r90; Component location view "1" at 1.495,70.68 h0.75 r90; Bottom Overlay "1" at 1.495,70.68 h0.75 r90; Bottom Overlay "2" at 1.495,65.68 h0.75 r90
J2: Component location view "4" at 1.495,34.634 h0.75 r90; Component location view "3" at 1.495,39.689 h0.75 r90; Component location view "2" at 1.495,44.76 h0.75 r90; Component location view "1" at 1.495,49.76 h0.75 r90; Bottom Overlay "1" at 1.495,49.76 h0.75 r90; Bottom Overlay "2" at 1.495,44.76 h0.75 r90; Bottom Overlay "3" at 1.495,39.689 h0.75 r90; Bottom Overlay "4" at 1.495,34.634 h0.75 r90
J3: Component location view "4" at 106.634,62.505 h0.75; Component location view "3" at 111.689,62.505 h0.75; Component location view "2" at 116.76,62.505 h0.75; Component location view "1" at 121.76,62.505 h0.75; Bottom Overlay "1" at 121.76,62.505 h0.75; Bottom Overlay "2" at 116.76,62.505 h0.75; Bottom Overlay "3" at 111.689,62.505 h0.75; Bottom Overlay "4" at 106.634,62.505 h0.75
J4: Component location view "1" at 1.495,18.22 h0.75 r90; Component location view "2" at 1.495,13.22 h0.75 r90; Component location view "3" at 1.495,8.149 h0.75 r90; Bottom Overlay "3" at 1.495,8.149 h0.75 r90; Bottom Overlay "2" at 1.495,13.22 h0.75 r90; Bottom Overlay "1" at 1.495,18.22 h0.75 r90
J5: Component location view "4" at 121.366,15.495 h0.75 r180; Component location view "3" at 116.311,15.495 h0.75 r180; Component location view "2" at 111.24,15.495 h0.75 r180; Component location view "1" at 106.24,15.495 h0.75 r180; Bottom Overlay "1" at 106.24,15.495 h0.75 r180; Bottom Overlay "2" at 111.24,15.495 h0.75 r180; Bottom Overlay "3" at 116.311,15.495 h0.75 r180; Bottom Overlay "4" at 121.366,15.495 h0.75 r180
M1: Bottom Overlay "ACL2" at 86.6,25.53 h1 r180; Bottom Overlay "COM2" at 76.694,25.53 h1 r180; Bottom Overlay "GL2" at 86.6,28.07 h1 r180; Bottom Overlay "VCE2" at 76.694,28.07 h1 r180; Bottom Overlay "GH2" at 86.6,30.61 h1 r180; Bottom Overlay "VISO2" at 76.694,30.61 h1 r180; Bottom Overlay "SOA2" at 86.6,33.15 h1 r180; Bottom Overlay "VE2" at 76.694,33.15 h1 r180; Bottom Overlay "ACL1" at 86.6,45.85 h1 r180; Bottom Overlay "COM1" at 76.694,45.85 h1 r180; Bottom Overlay "GL1" at 86.6,48.39 h1 r180; Bottom Overlay "VCE1" at 76.694,48.39 h1 r180; Bottom Overlay "GH1" at 86.6,50.93 h1 r180; Bottom Overlay "VISO1" at 76.694,50.93 h1 r180; Bottom Overlay "SOA1" at 86.6,53.47 h1 r180; Bottom Overlay "VE1" at 76.694,53.47 h1 r180; Bottom Overlay "TB" at 40.88,42.04 h1 r180; Bottom Overlay "SO" at 32.752,42.04 h1 r180; Bottom Overlay "VCC" at 40.88,44.58 h1 r180; Bottom Overlay "GND" at 32.752,44.58 h1 r180; Bottom Overlay "INB" at 40.88,47.12 h1 r180; Bottom Overlay "INA" at 32.752,47.12 h1 r180
TP1: Mechanical 32 "1" at 46.837,49 h0.41 r180
TP2: Mechanical 32 "1" at 15,48.837 h0.41 r270
TP3: Mechanical 32 "1" at 43,41.837 h0.41 r270
TP4: Mechanical 32 "1" at 19,39.837 h0.41 r270
TP5: Mechanical 32 "1" at 39,49.837 h0.41 r270
TP6: Mechanical 32 "1" at 16,35.837 h0.41 r270
TP7: Mechanical 32 "1" at 19,27.837 h0.41 r270
TP8: Mechanical 32 "1" at 11,21.163 h0.41 r90
TP9: Mechanical 32 "1" at 36,49.837 h0.41 r270
TP10: Mechanical 32 "1" at 11,11.663 h0.41 r90
TP11: Mechanical 32 "1" at 16,23.837 h0.41 r270
TP12: Mechanical 32 "1" at 10,43.837 h0.41 r270
TP13: Mechanical 32 "1" at 11,15.163 h0.41 r90
TP14: Mechanical 32 "1" at 12,35.837 h0.41 r270
TP15: Mechanical 32 "1" at 10,31.837 h0.41 r270
TP16: Mechanical 32 "1" at 37,38.163 h0.41 r90
TP17: Mechanical 32 "1" at 12,23.837 h0.41 r270
TP18: Mechanical 32 "1" at 37.163,66 h0.41
TP19: Mechanical 32 "1" at 33,46.837 h0.41 r270
TP101: Mechanical 32 "1" at 60.163,53 h0.41
TP102: Mechanical 32 "1" at 60.163,50 h0.41
TP103: Mechanical 32 "1" at 60.163,47 h0.41
TP104: Mechanical 32 "1" at 93,51.837 h0.41 r270
TP105: Mechanical 32 "1" at 93,45.837 h0.41 r270
TP106: Mechanical 32 "1" at 121.285,63.972 h0.41 r270
TP107: Mechanical 32 "1" at 111,48.837 h0.41 r270
TP201: Mechanical 32 "1" at 60.163,31 h0.41
TP202: Mechanical 32 "1" at 60.163,28 h0.41
TP203: Mechanical 32 "1" at 60.163,25 h0.41
TP204: Mechanical 32 "1" at 93,31.837 h0.41 r270
TP205: Mechanical 32 "1" at 93,25.837 h0.41 r270
TP206: Mechanical 32 "1" at 121.448,13.97 h0.41
TP207: Mechanical 32 "1" at 111,28.837 h0.41 r270